# EAGLE board Exquisite Trug (EAGLE 9.7.0)

Size 171.83 x 188.09 mm. Coordinates in mm from the lower left corner, seen from the top.
Outline: 0,0 171.83,0 171.83,188.09 0,188.09 0,0
Copper layers (1*16): Top 0.035mm / dielectric 1.5mm / Bottom 0.035mm
Design rules "default": minimum track width 6mil, minimum drill 0.35mm, track to track 6mil, track to pad 6mil, pad to pad 6mil, via to via 6mil, smd to smd 6mil, copper to edge 40mil, drill to drill 6mil, minimum pad ring 10mil, minimum via ring 8mil, stop-mask expansion 4mil, vias tented up to drill 0mil, thermal gap 10mil

## Footprints (pad centres in the part's own frame; a part is rotated, then mirrored left to right if it is on the bottom)
BATTERY-GENERIC = drill 1.118 pad 3.15 octagon: + 2.54,0; - -2.54,0
LEDRD254W60D565H860B_Y = drill 0.981 pad 1.581: 1 -1.27,0; 2 1.27,0
LEDRD254W60D565H860B_O = drill 0.981 pad 1.581: 1 -1.27,0; 2 1.27,0
LU-5-R = drill 0.8: 1 -6.35,-3.81; 5 3.81,-3.81; 6 6.35,-3.81; 7 6.35,3.81; 8 3.81,3.81; 12 -6.35,3.81
MOTOR = drill 1.118 pad 3.15 octagon: + 2.54,0; - -2.54,0
RESAD1016W63L850D250B = drill 0.83 pad 1.43: 1 -5.08,0; 2 5.08,0
ARDUINO-UNO-R3-SHIELD = drill 1.016 pad 1.88: 3.3V 24.13,-2.54; 5V 24.13,0; A0 24.13,12.7; A1 24.13,15.24; A2 24.13,17.78; A3 24.13,20.32; A4 24.13,22.86; A5 24.13,25.4; AREF -24.13,-13.97; D2 -24.13,20.32; D3 -24.13,17.78; D4 -24.13,15.24; D5 -24.13,12.7; D6 -24.13,10.16; D7 -24.13,7.62; D8 -24.13,3.81; D9 -24.13,1.27; D10 -24.13,-1.27; D11 -24.13,-3.81; D12 -24.13,-6.35; D13 -24.13,-8.89; GND@0 24.13,2.54; GND@1 24.13,5.08; GND@2 -24.13,-11.43; IOREF 24.13,-7.62; NC 24.13,-10.16; RES 24.13,-5.08; RX -24.13,25.4; SCL -24.13,-19.05; SDA -24.13,-16.51; TX -24.13,22.86; VIN 24.13,7.62

## Placement (x,y rotation side)
BAT1  9V  [BATTERY-GENERIC]  163.58,179.84 270 top
D1  YELLOW  [LEDRD254W60D565H860B_Y]  112.42,19.67 180 top
D2  ORANGE  [LEDRD254W60D565H860B_O]  100.61,69 180 top
D3  ORANGE  [LEDRD254W60D565H860B_O]  113.52,85.66 180 top
K1  RELAY-SPDT_LU-5-R  [LU-5-R]  151.65,141.23 180 top
K2  RELAY-SPDT_LU-5-R  [LU-5-R]  151.65,123.45 180 top
K3  RELAY-SPDT_LU-5-R  [LU-5-R]  151.86,79.25 180 top
K4  RELAY-SPDT_LU-5-R  [LU-5-R]  151.77,24.26 180 top
K5  RELAY-SPDT_LU-5-R  [LU-5-R]  151.86,61.47 180 top
M2  MOTOR_HDR  [MOTOR]  105.87,154.4 0 top
MFAN1  MOTOR_HDR  [MOTOR]  126.48,172.61 0 top
R1  1k  [RESAD1016W63L850D250B]  95.65,61.33 90 top
R2  1k  [RESAD1016W63L850D250B]  105.12,8.97 90 top
R3  220  [RESAD1016W63L850D250B]  112.29,74.84 90 top
U1  ARDUINO-UNO-R3-SHIELD  [ARDUINO-UNO-R3-SHIELD]  47.88,71.77 270 top

## Library data of the parts
BAT1 K1-K5 M2 MFAN1 R1-R3 U1 = Tinkercad
D1 = Tinkercad; CATEGORY: Opto-Electronic; SUB-CATEGORY: LED; VALUE: LED_YELLOW
D2 D3 = Tinkercad; CATEGORY: Opto-Electronic; SUB-CATEGORY: LED; VALUE: LED_ORANGE

## Nets
BAT1+: BAT1.+ K1.1 K1.12 K2.1 K2.12 K3.1 K3.12 K4.1 K4.12 K5.1 K5.12
BAT1-: BAT1.- M2.- MFAN1.- R1.1 R2.1 R3.1
D1_A: D1.1 K4.6 K4.7
D1_C: D1.2 R2.2
D2_A: D2.1 K5.6 K5.7
D2_C: D2.2 R1.2
D3_A: D3.1 K3.6 K3.7
D3_C: D3.2 R3.2
K3_COIL1: K3.5 K3.8
K4_COIL1: K4.5 K4.8
K5_COIL1: K5.5 K5.8
M2_+: K2.6 K2.7 M2.+
MFAN1_+: K1.6 K1.7 MFAN1.+
U1_GND: K1.5 K1.8 K2.5 K2.8 U1.D2 U1.D3 U1.GND@0 U1.GND@1 U1.GND@2

## Tracks (layer width: path | path; a pad name or v marks a point on that pad's centre or on a via)
BAT1+  (10 unrouted)
BAT1-  (5 unrouted)
D1_A  (2 unrouted)
D1_C  (1 unrouted)
D2_A  (2 unrouted)
D2_C  (1 unrouted)
D3_A  (2 unrouted)
D3_C  (1 unrouted)
K3_COIL1  (1 unrouted)
K4_COIL1  (1 unrouted)
K5_COIL1  (1 unrouted)
M2_+  (2 unrouted)
MFAN1_+  (2 unrouted)
U1_GND  (8 unrouted)